# Altium PCB Rackmount_DSP.PcbDoc (part 15 of 24)
Units mil, origin at the board's own origin, x right, y up, seen from the top; angles counter-clockwise.
Board outline 10629.92 x 8267.72 mil, 4 copper layers (Top Layer, Mid Layer 1, Mid Layer 2, Bottom Layer), stack 36.2 mil thick; 4500 components, 1565 nets, 9765 pads, 3289 vias.
Unrouted connection lines stored in the file: 1.
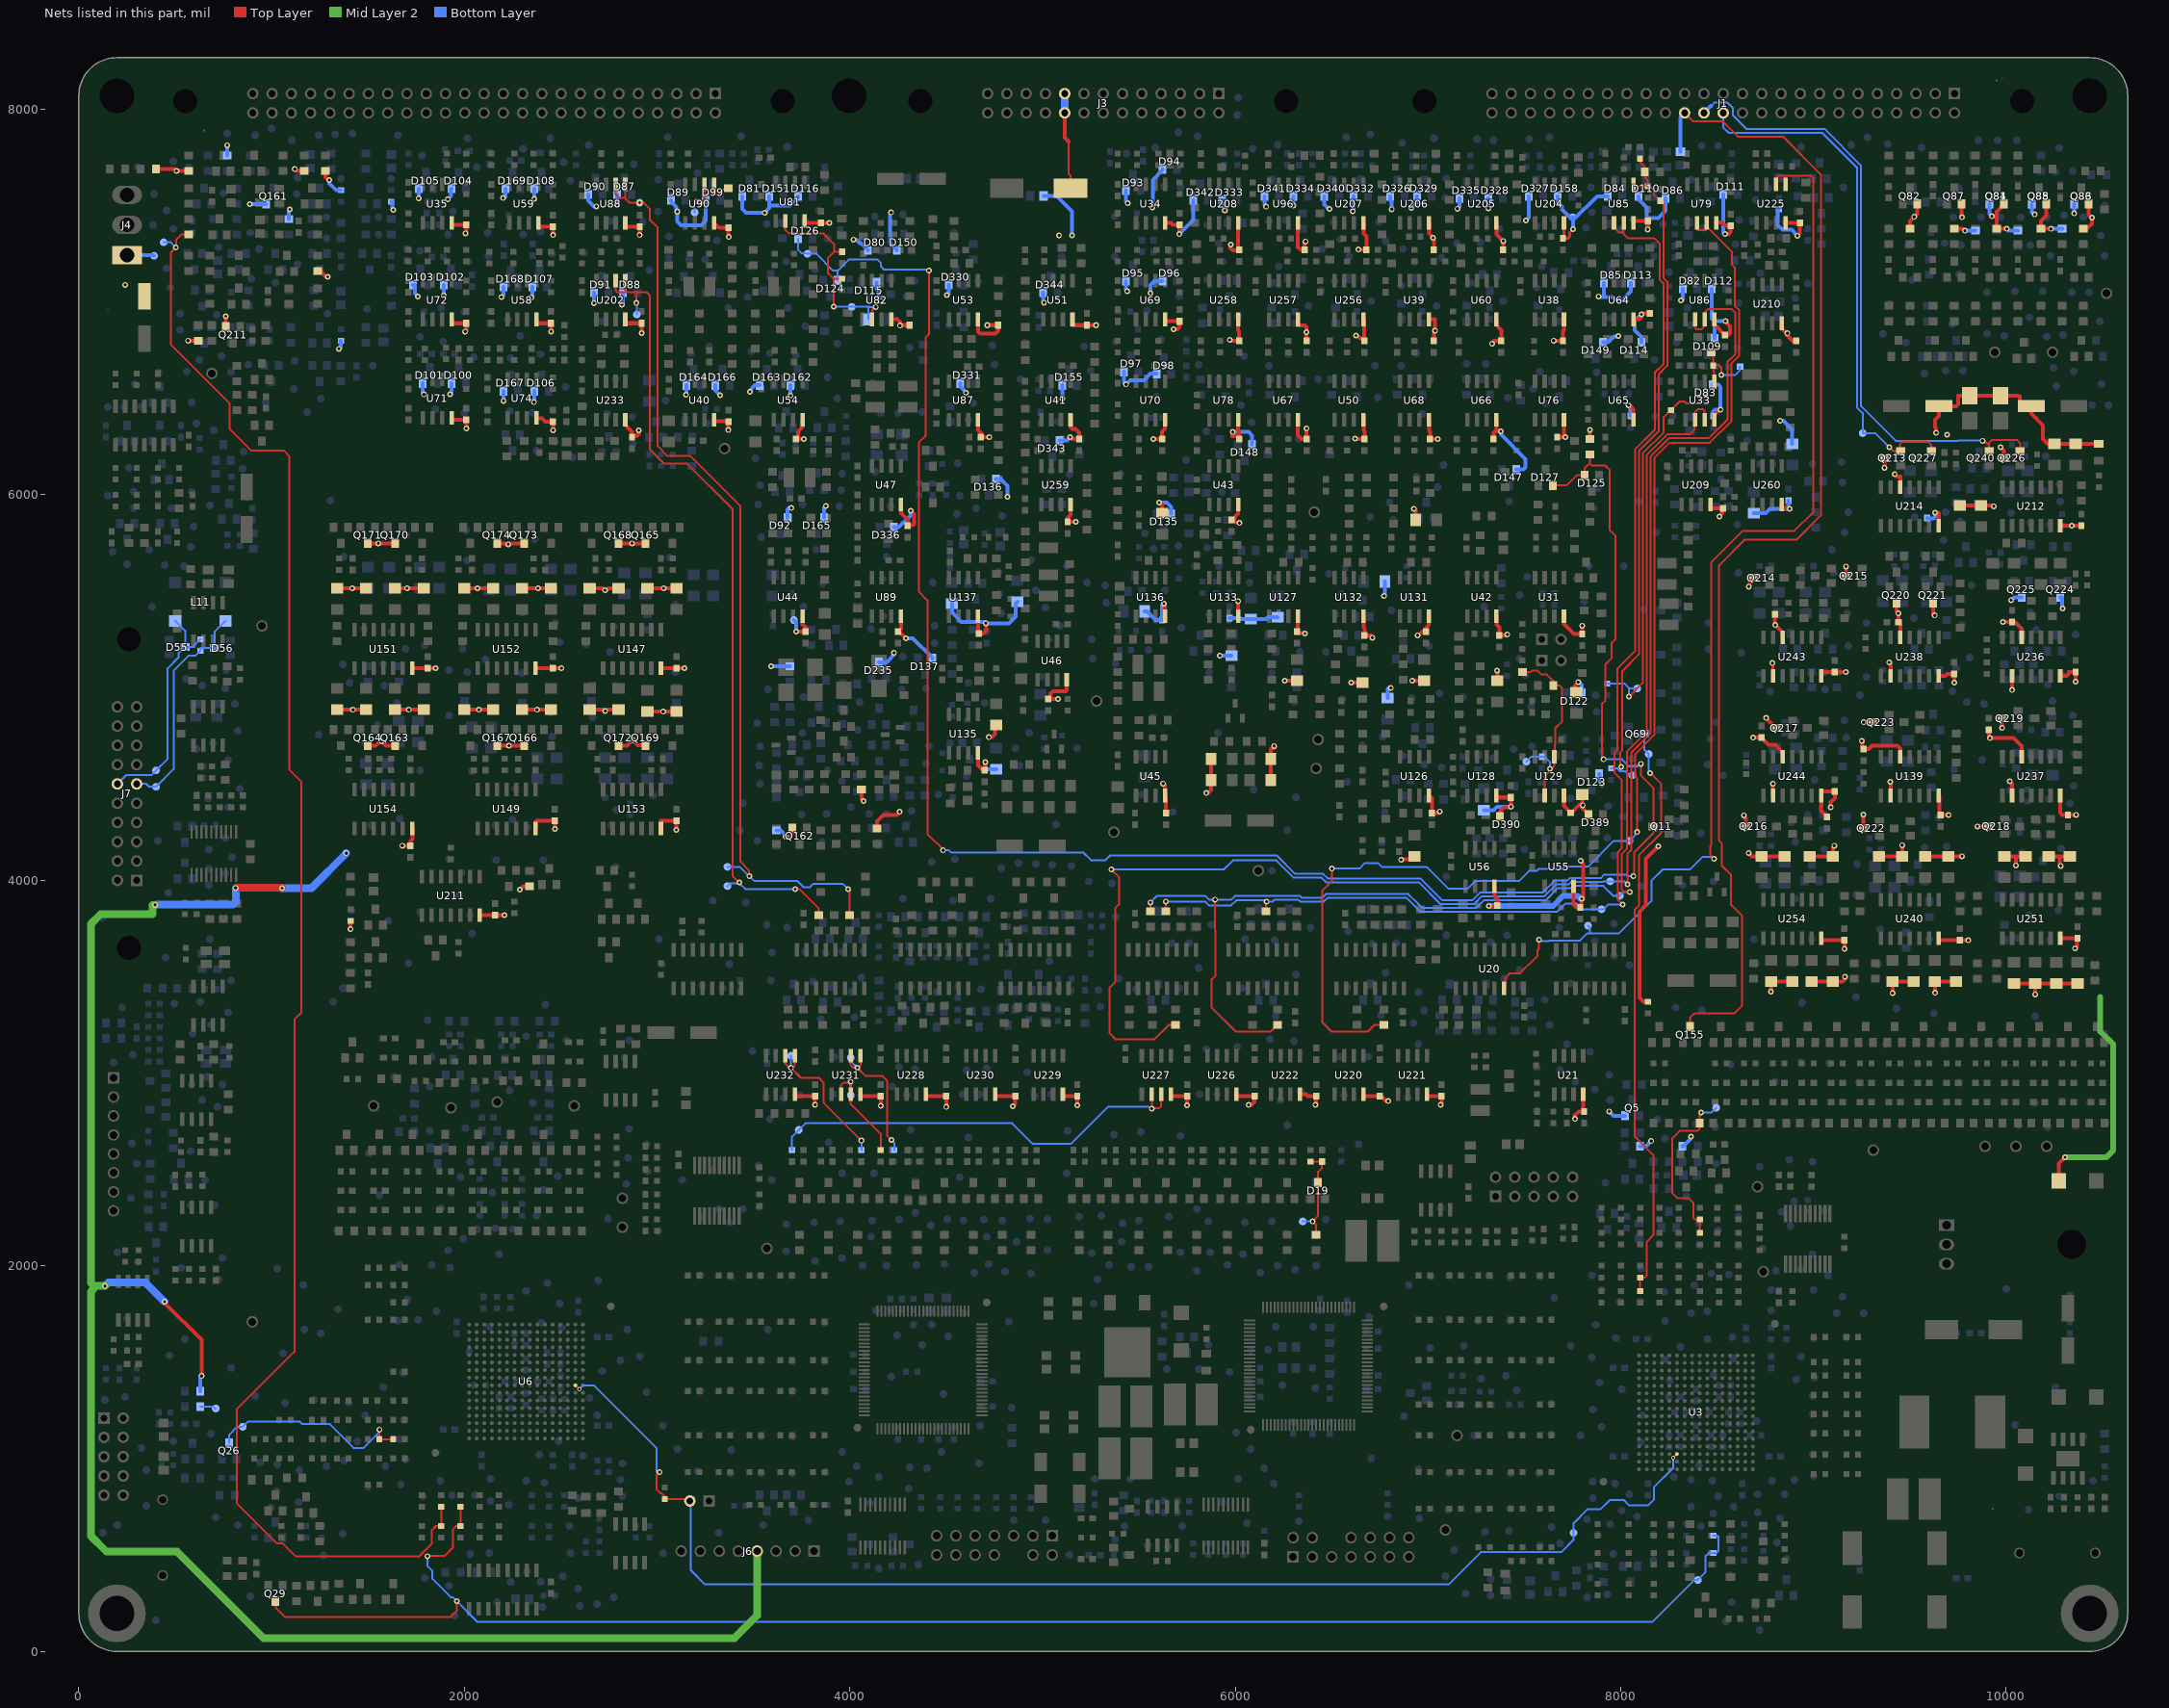
[diagram p17: the nets of this part, all layers, seen from the top]

## Via types
v1: diameter 30, hole 16, Top Layer to Bottom Layer, 3143 vias
v2: diameter 22, hole 12, Top Layer to Bottom Layer, 146 vias

## Nets (pads, with @x,y where several pads share a name; then routed paths per layer and width w, separated by ;. In a path a pad name is that pad's centre, name@x,y a point inside that pad or via, vN(x,y) a via of type N, cw(c..) or ccw(c..) an arc to the next point about the centre after c; other vN are vias at no path point) (continued)
REC_VIN_C: C1075.2 D19.3 R13.1 R929.1 TP800.1 | length 519.1
  Top Layer w10: R929.1@6390,2540 C1075.2@6450,2540 6450,2507.5 6430,2487.5 D19.3@6430,2431.5 6430,2259.1 v1(6400.9,2230) 6420,2210.9 R13.1@6420,2160
  Bottom Layer w10: TP800.1@6350,2230 v1(6400.9,2230)
RESET_FROM_REC: R723.2 R1043.2 R2224.2 TP803.1 | length 8613
  Top Layer w10: R2224.2@570,7350 531.36,7350 505.16,7323.8 505.16,7285.75 v1(503.21,7283.8) 477.72,7258.31 477.72,6778.64 782.5,6473.86 782.5,6340.97 893.87,6229.6 1062.09,6229.6 1092.42,6199.27 1092.42,4572.96 1153.35,4512.03 1153.35,3312.47 1118.48,3277.61 1118.48,1554.94 819.36,1255.81 819.36,768.43 1027.79,560 1057.58,560 1124.03,493.55 1766.18,493.55 1830,557.37 1830,626.46 1853.54,650 R723.2@1880,650 R1043.2@1880,750
  Bottom Layer w10: TP803.1@440,7310 477.01,7310 v1(503.21,7283.8)
SER_BUS_H: D55.3 J7.12 L11.4 R1349.1 TP1864.1 | length 1187.3
  Bottom Layer w10: J7.12@200,4500 245.25,4545.25 375.25,4545.25 TP1864.1@400,4570 460.37,4630.37 460.37,5099.66 517.39,5156.68 517.39,5179.39 548,5210 D55.3@551.5,5210 ; L11.4@499.29,5345 501.29,5345 551.5,5294.79 D55.3@551.5,5210 ; R1349.1@630,5250 629,5250 603.39,5224.39 603.39,5223.39 590,5210 D55.3@551.5,5210
SER_BUS_L: D56.3 J7.11 L11.3 R1349.2 TP471.1 | length 1181
  Bottom Layer w10: J7.11@300,4500 350,4500 365,4485 TP471.1@400,4485 491.79,4576.79 491.79,5087.86 568.33,5164.39 603.39,5164.39 629,5190 R1349.2@630,5190 630,5205 D56.3@703.5,5205 703.5,5289.79 758.71,5345 L11.3@760.71,5345
SERVICE_MODE: J12.2 R712.2 TP473.1 U3.L14 U6.B9 | length 6950.2
  Top Layer w10: U6.B9@2575.91,1380.32 v2(2595.59,1360.63) ; v1(3013.4,929.88) 2998.5,914.98 2998.5,906.78 2998.5,839.29 3017.79,820 3022.96,820 3040,802.96 R712.2@3040,790 3170,790 J12.2@3170,780 ; v2(8271.89,1003.78) U3.L14@8291.57,1023.46
  Bottom Layer w10: v2(2595.59,1360.63) 2613.98,1379.01 2672.92,1379.01 2998.5,1053.44 2998.5,929.88 v1(3013.4,929.88) ; J12.2@3170,780 3174.72,780 3174.72,420.79 3248.45,347.06 7106.58,347.06 7273.94,514.42 7690.4,514.42 7755,579.02 TP473.1@7755,615 7755,664.5 7826.98,736.48 7894.28,736.48 7942.8,785 8015,785 8041.94,758.06 8142.77,758.06 8171,786.29 8171,850.5 8271.89,951.39 v2(8271.89,1003.78)
SOFT_START_RELAY: C1176.1 J1.30 Q155.3 TP804.1 | length 6133.5
  Top Layer w10: J1.30@8331.5,7981.5 8376.5,7936.5 8529.56,7936.5 8607.06,7858.99 8841.29,7858.99 9037.5,7662.78 9037.5,5892.43 8912.45,5767.39 8643.21,5767.39 8510.03,5634.21 8510.03,4205.84 8523.87,4192 8523.87,4076.51 8572.62,4027.76 8572.62,3872.59 8629.46,3815.75 8629.46,3350.14 8590.13,3310.81 8382.69,3310.81 8360,3288.12 Q155.3@8360,3241.5
  Bottom Layer w20: C1176.1@8310,7780 8310,7957.61 8331.5,7979.1 J1.30@8331.5,7981.5 TP804.1@8335,7985
SOFT_START_RELAY_CPLD_IN: Q69.3 R671.1 R1074.2 TP470.1 | length 3073.2
  Top Layer w10: R1074.2@8100,1870 R671.1@8100,1940 8125.74,1940 8135.38,1949.64 8135.38,2125.75 8168.79,2159.16 8168.79,2575.17 8071.06,2672.9 8071.06,3846.99 8095.48,3871.4 8095.48,4132.11 8209.74,4246.37 8209.74,4499.62 v1(8152.71,4556.64)
  Bottom Layer w10: Q69.3@8121.5,4760 8121.5,4678.5 TP470.1@8145,4655 8144.66,4655 8144.66,4556.64 v1(8152.71,4556.64)
SOFT_START_RELAY_CPLD_OUT: R708.1 R999.2 R2413.1 TP805.1 | length 937.1
  Top Layer w10: R999.2@8410,2170 R708.1@8410,2240 8386.02,2240 8377.83,2248.19 8377.83,2325.08 8351.47,2351.44 8293.02,2351.44 8267.2,2377.25 8267.2,2662.79 8304.58,2700.17 8397.12,2700.17 8410,2713.04 R2413.1@8410,2740 8410,2788.13 v1(8417.23,2795.36)
  Bottom Layer w10: v1(8417.23,2795.36) 8470.36,2795.36 TP805.1@8495,2820
SYS_RESET: D124.2 D125.2 D126.2 D127.2 Q11.3 R1465.2 TP469.1 | length 10585.8
  Top Layer w10: v1(4410,7163.9) 4410,6832 4392.5,6814.5 4392.5,6305 4357.5,6270 4357.5,5497.87 4403.12,5452.25 4403.12,4239.8 4485.97,4156.96 v1(4484.41,4155.41) ; D127.2@7647.5,6048.5 7719.03,6048.5 7772.03,6101.5 D125.2@7812.5,6101.5 7812.5,6137.26 7838.37,6163.12 7840,6161.49 ; R1465.2@7840,6210 7840,6161.49 ; v1(7910.96,4627.5) 7901.38,4627.5 7901.38,4913.59 7920,4932.21 7920,5120.55 7953.11,5153.66 7953.11,5232.37 7971.72,5250.97 7971.72,5788.53 7943.06,5817.19 7943.06,6127.59 7919.75,6150.9 7850.59,6150.9 7840,6161.49 ; v1(8065.48,4022.38) 8068.5,4022.38 8068.5,4143.9 8168.5,4243.9 Q11.3@8168.5,4280 8168.5,4479.64 8105.19,4542.95 v1(8105.19,4604.77)
  Bottom Layer w10: D126.2@3732.5,7328.5 3732.5,7270.39 3748.7,7254.19 3775.81,7254.19 TP469.1@3780,7250 3826.73,7250 3913.51,7163.22 3937.5,7163.22 ; D124.2@3937.5,7111.5 3937.5,7163.22 ; v1(4410,7163.9) 4404.76,7169.14 4176.02,7169.14 4161.47,7183.7 4161.47,7202.92 4144.38,7220 3994.28,7220 3937.5,7163.22 ; v1(4484.41,4155.41) 4514.41,4155.41 4524.82,4145 5210.2,4145 5250.94,4104.26 5326.37,4104.26 5350.04,4127.93 6216.41,4127.93 6310.76,4033.58 6455.87,4033.58 6479.65,4009.8 6959.75,4009.8 7073.84,3895.71 7229.79,3895.71 7271.92,3937.84 7595.38,3937.84 7655.82,3998.28 7721.42,3998.28 7734.15,4011.01 7895.32,4011.01 7914.3,4030 8030.88,4030 8038.5,4022.38 v1(8065.48,4022.38) ; v1(7910.96,4627.5) 8006.01,4627.5 8041.17,4592.33 8089,4592.33 8101.44,4604.77 v1(8105.19,4604.77)
T_MOD: TP1863.1 U20.14 U225.1 U225.2 | length 5771.1
  Top Layer w10: U20.14@7395,3440 7401.5,3440 7401.5,3494.52 7425.3,3518.32 7477.54,3518.32 7568.58,3609.37 7568.58,3636.86 7574.51,3642.79 7574.51,3689.95 7575.99,3689.95 v1(7575.99,3691.61) ; v1(8483.19,4112.1) 8483.19,4115.89 8463.87,4135.21 8463.87,4176.14 8470.03,4182.31 8470.03,5650.78 8631.9,5812.65 8901.15,5812.65 8997.5,5909 8997.5,7646.21 8988.71,7655 8855,7655 ; U225.2@8805,7610 8805,7643.01 8816.99,7655 8855,7655 ; U225.1@8855,7610 8855,7655
  Bottom Layer w10: v1(7575.99,3691.61) 7575.99,3687.74 7578.94,3684.79 7626.24,3684.79 7629.3,3687.85 7789.06,3687.85 7824.61,3723.39 7840.59,3723.39 ; TP1863.1@7830,3765 7840.59,3754.41 7840.59,3723.39 ; v1(8483.19,4112.1) 8483.19,4121.14 8423.21,4121.14 8357.62,4055.55 8217.07,4055.55 8158.58,3997.06 8158.58,3892.61 7989.37,3723.39 7840.59,3723.39
V+CHG_PWM: J1.26 Q213.2 Q227.2 TP1769.1 | length 2722.9
  Top Layer w10: v1(9392.82,6247.41) 9412.73,6227.5 Q213.2@9447.71,6227.5 ; Q213.2@9451.5,6227.5 Q213.2@9447.71,6227.5 ; Q227.2@9611.5,6227.5 9611.5,6258.96 9594.86,6275.6 9460.29,6275.6 9447.71,6263.02 Q213.2@9447.71,6227.5
  Bottom Layer w10: J1.26@8531.5,7981.5 8531.5,7906.3 8560.04,7877.75 9044.91,7877.75 9227.13,7695.53 9227.13,6451.22 9255,6423.35 TP1769.1@9255,6320 9320.23,6320 v1(9392.82,6247.41)
V-CHG_PWM: J1.28 Q226.2 Q240.2 TP492.1 | length 3250.6
  Top Layer w10: v1(9876.75,6280.15) 9886.67,6280.15 9902.92,6263.9 9911.5,6263.9 ; Q240.2@9911.5,6227.5 9911.5,6263.9 ; Q226.2@10071.5,6227.5 10071.5,6268.93 10056.96,6283.47 9925.4,6283.47 9911.5,6269.57 9911.5,6263.9
  Bottom Layer w10: 8469.07,8018.12 8485.36,8034.4 8554.04,8034.4 8581.5,8006.95 8581.5,7967.86 8651.43,7897.92 9056.37,7897.92 9247.13,7707.17 9247.13,6459.62 9426.67,6280.07 9748.44,6280.07 9750.87,6282.5 9876.75,6282.5 v1(9876.75,6280.15)
  Bottom Layer w20: TP492.1@8430,7980 8430,7981.5 J1.28@8431.5,7981.5 8466.85,8016.85 8467.81,8016.85 8469.07,8018.12
VBAT+: R1158.1 TP1605.1 U79.6 U79.7 | length 6626.8
  Top Layer w10: v1(6500.68,4060.83) 6500.68,3994.26 6451,3944.58 6451,3265.07 6501.07,3215 6687.98,3215 6722.98,3250 R1158.1@6770,3250 ; v1(8084.92,4250.62) 8084.92,4526.84 8075,4536.76 8075,4654.94 8174.01,4753.95 8174.01,6190.16 8254.23,6270.38 8461.38,6270.38 8575,6384 8575,6682.35 8615.15,6722.5 8615.15,6956.47 8591,6980.62 8591,7179.25 8577.83,7192.42 8577.83,7259.46 U79.7@8445,7392.29 ; U79.6@8395,7410 8395,7378.78 8401.14,7372.64 8438.96,7372.64 8445,7378.68 U79.7@8445,7392.29 ; U79.7@8445,7410 U79.7@8445,7392.29
  Bottom Layer w10: v1(6500.68,4060.83) 6644.16,4060.83 6673.14,4089.8 6740.4,4089.8 6760.1,4070.1 6992.55,4070.1 7106.94,3955.71 7204.93,3955.71 7247.06,3997.84 7472.94,3997.84 7523.52,4048.43 7562.81,4048.43 7572.67,4058.28 7696.57,4058.28 7709.3,4071.01 7830.51,4071.01 7964.5,4205 TP1605.1@8045,4205 8073.47,4233.47 8073.47,4239.17 v1(8084.92,4250.62)
VBAT-: R1221.1 TP490.1 U86.6 U86.7 | length 7788
  Top Layer w10: v1(5356.62,4056.73) 5396.21,4017.13 5396.21,3875.37 5376.35,3855.51 5376.35,3471.75 5348.41,3443.81 5348.41,3205.65 5379.86,3174.2 5579.11,3174.2 5654.92,3250 R1221.1@5690,3250 ; v1(8034.17,3979.38) 8034.17,4137.85 8054.57,4158.25 8054.57,4662.79 8154.01,4762.23 8154.01,6198.44 8249.46,6293.89 8456.61,6293.89 8554.3,6391.59 8554.3,6690.34 8594.95,6730.99 8594.95,6944.61 8576.22,6963.34 8451.48,6963.34 8435.84,6947.7 8435.84,6910 U86.7@8435,6910 8435,6874.88 8420.12,6860 8391.9,6860 8385,6866.9 U86.6@8385,6910
  Bottom Layer w10: v1(5356.62,4056.73) 5941.49,4056.73 5987.73,4102.96 6213.09,4102.96 6302.48,4013.58 6447.59,4013.58 6471.36,3989.8 6951.46,3989.8 7065.55,3875.71 7238.07,3875.71 7280.2,3917.84 7603.66,3917.84 7664.1,3978.28 7729.7,3978.28 7742.44,3991.01 7906.01,3991.01 7910,3995 TP490.1@7945,3995 8018.55,3995 v1(8034.17,3979.38)
VBP_A: R3006.1 TP1895.1 U90.1 U90.2 | length 372.3
  Top Layer w10: v1(3202.82,7521.02) 3233.43,7521.02 3245,7532.59 3245,7559.74 ; U90.2@3245,7610 3245,7559.74 ; U90.1@3295,7610 3295,7559.74 ; R3006.1@3370,7590 3350.51,7590 3319.18,7558.67 3296.07,7558.67 3295,7559.74 ; 3245,7559.74 3295,7559.74
  Bottom Layer w10: TP1895.1@3195,7465 3195,7513.19 v1(3202.82,7521.02)
VBP_A/VOUT_A: R904.1 TP807.1 U231.1 U231.2 | length 784.5
  Top Layer w10: U231.2@4005,3090 4005,3040.82 4018.07,3027.75 v1(4038.8,3027.75) ; U231.1@4055,3090 4055,3040 4042.75,3027.75 v1(4038.8,3027.75) ; v1(4215.98,2652.71) 4194.77,2673.92 4194.77,2959.94 4170.59,2984.12 4082.43,2984.12 v1(4038.8,3027.75)
  Bottom Layer w10: TP807.1@4005,3080 4005,3076 4005.35,3075.66 4005.35,3061.21 v1(4038.8,3027.75) ; v1(4215.98,2652.71) 4230,2638.69 R904.1@4230,2600
VBP_B: R3007.1 TP489.1 TP1004.1 U88.1 U88.2 | length 4913.6
  Top Layer w10: U88.2@2785,7610 2785,7560 2805,7540 2833.95,7540 2835,7541.05 ; U88.1@2835,7610 2835,7541.05 ; v1(2910,7515) v1@2909.74,7515 ; v1(3478.42,4021.97) 3476.5,4021.97 3476.5,4052.72 3432.41,4096.81 3432.41,5941.24 3172.59,6201.06 3053.73,6201.06 3002.5,6252.29 3002.5,7387.89 2962.03,7428.35 2962.03,7484.59 2934.72,7511.9 2909.74,7511.9 v1@2909.74,7515 ; v1(3991.7,3954.21) 3997.88,3954.21 4000,3952.09 R3007.1@4000,3820 ; 2835,7541.05 2835,7536.32 2855.32,7516 2909.74,7516 v1@2909.74,7515
  Bottom Layer w10: TP489.1@3365,4070 3429.22,4070 v1@3478.42,4020.81 ; v1(3478.42,4021.97) v1@3478.42,4020.81 ; v1(3991.7,3954.21) 3963.24,3982.66 3811.17,3982.66 3792.72,3964.21 3760.26,3964.21 3728.98,3995.49 3504.9,3995.49 3479,4021.39 v1@3478.42,4020.81
VBP_B/VOUT_B: R909.1 TP808.1 U231.6 U231.7 | length 593
  Top Layer w10: U231.6@3955,2890 3955,2938.1 3966.94,2950.04 v1@4005,2950.04 ; v1(4005,2955.4) v1@4005,2950.04 ; R909.1@4160,2600 4160,2685 4005,2840 U231.7@4005,2890 v1@4005,2950.04
  Bottom Layer w10: TP808.1@4005,2885 v1(4005,2955.4)
VBP_C: R3008.1 TP488.1 TP1003.1 U202.1 U202.2 | length 4299.3
  Top Layer w10: U202.2@2785,7110 2785,7059.26 2794.26,7050 2835.9,7050 ; U202.1@2835,7110 2835,7050.9 2835.9,7050 ; v1(2892.09,6995.12) 2892.09,7050 ; v1(3426.96,3988.57) 3424.93,3988.57 3392.41,4021.09 3392.41,5924.67 3156.02,6161.06 3037.16,6161.06 2962.5,6235.72 2962.5,7034.97 2947.47,7050 2892.09,7050 ; v1(3716.78,3954.76) 3737.72,3954.76 3840,3852.49 R3008.1@3840,3820 ; 2835.9,7050 2892.09,7050
  Bottom Layer w10: v1(2892.09,6995.12) 2895,6992.21 TP1003.1@2895,6935 ; TP488.1@3365,3970 3380.45,3985.45 v1@3426.96,3985.45 ; v1(3426.96,3988.57) v1@3426.96,3985.45 ; v1(3716.78,3954.76) 3457.16,3954.76 3431.17,3980.75 3426.96,3980.75 v1@3426.96,3985.45
VBP_C/VOUT_C: R921.1 TP809.1 U232.1 U232.2 | length 851.8
  Top Layer w10: U232.2@3665,3090 3665,3047.82 3685.92,3026.9 v1(3695,3026.9) ; U232.1@3715,3090 3715,3040 3701.9,3026.9 v1(3695,3026.9) ; v1(4060,2649.76) 3864.75,2845.01 3864.75,2949.96 3839.33,2975.38 3746.52,2975.38 v1(3695,3026.9)
  Bottom Layer w10: v1(3695,3026.9) TP809.1@3695,3090 ; R921.1@4060,2600 v1(4060,2649.76)
VBP_FEEDBACK: R2200.1 TP1671.1 | length 85.7
  Bottom Layer w10: R2200.1@630,1270 696.34,1270 708.17,1258.17 TP1671.1@710,1260
VBP_FEEDBACK_IN: Q26.3 R754.2 R1035.2 TP487.1 | length 1074.8
  Top Layer w10: v1(1560,1150.54) R754.2@1560,1100 R1035.2@1630,1100
  Bottom Layer w10: Q26.3@780,1081.5 780,1123.15 821.85,1165 TP487.1@850,1165 877.57,1192.57 1144.23,1192.57 1156.92,1179.88 1299.91,1179.88 1424.8,1055 1476.85,1055 1560,1138.15 v1(1560,1150.54)
VBUS_N: R1161.1 R1217.1 TP486.1 U85.6 U85.7 | length 6505.2
  Top Layer w10: R1161.1@5640,3840 v1(5640,3890.26) ; R1217.1@6160,3840 6160,3886.18 v1(6162.79,3888.97) ; U85.6@7965,7410 7965,7386.5 7991.5,7360 8015,7360 ; v1(8010.32,3875) 7983.72,3901.6 7983.72,4143.97 8004.13,4164.38 8004.13,4521.72 7966.08,4559.78 7966.08,4661.12 7981.43,4676.47 7981.43,5097.13 8074.01,5189.7 8074.01,6235.16 8177.15,6338.3 8177.15,6634.64 8221,6678.49 8221,7097.35 8201,7117.35 8201,7303.75 8173.5,7331.25 8036.09,7331.25 8015,7352.35 8015,7360 ; U85.7@8015,7410 8015,7360
  Bottom Layer w10: v1(5640,3890.26) 5843.97,3890.26 5863.97,3870.26 5978.65,3870.26 6004.63,3896.24 6155.52,3896.24 v1(6162.79,3888.97) 6192.79,3888.97 6202.62,3898.8 6327.31,3898.8 6336.75,3889.35 6458.05,3889.35 6477.79,3909.09 6889.11,3909.09 6940.33,3857.88 6940.54,3857.88 6962.7,3835.71 7669.67,3835.71 7712.32,3878.37 7771.9,3878.37 7800.27,3850 TP486.1@7900,3850 7910.49,3850 7935.49,3875 v1(8010.32,3875)
VBUS_N_FOR_SS_CMP: C1223.2 R1458.1 R1603.1 R1606.2 R2560.2 TP485.1 U85.1 | length 3562.3
  Top Layer w10: v1(8001.85,4589.03) 7996.08,4589.03 7996.08,4662.58 8007.57,4674.08 8007.57,5085.69 8094.01,5172.13 8094.01,6226.87 8197.15,6330.02 8197.15,6626.35 8241,6670.21 8241,7105.63 8221,7125.63 8221,7509 C1223.2@8205,7525 8172.67,7557.33 8172.67,7580.83 8153.5,7600 R1603.1@8140,7600 ; U85.1@8065,7610 8075,7600 R1603.1@8140,7600 ; R1606.2@8100,7745 8100,7729.58 8100,7726.46 8110.63,7715.83 8125,7701.46 R2560.2@8125,7675 8125,7646.82 8129.72,7642.1 8140,7631.82 R1603.1@8140,7600
  Bottom Layer w10: R1458.1@7950,4580 7981.72,4580 7996.08,4565.64 ; v1(8001.85,4589.03) 7996.08,4589.03 7996.08,4565.64 ; TP485.1@8060,4545 8044.71,4545 8024.06,4565.64 7996.08,4565.64
VBUS_OVP: Q29.3 R672.2 R673.1 R1015.2 R1054.1 TP484.1 | length 8645.9
  Top Layer w10: Q29.3@1020,258.5 1021.08,258.5 1021.08,227.03 1071,177.12 1925.94,177.12 1961.14,212.31 v1(1961.14,259.81) ; v1(1809,493.95) 1809,496.32 1898.71,496.32 1940.05,537.66 1940.05,631.92 1958.13,650 R672.2@1980,650 R1015.2@1980,750
  Bottom Layer w10: v1(1809,493.95) 1807.62,493.95 1807.62,444.01 1834.06,417.57 1834.06,376.44 1929.48,281.02 1939.92,281.02 v1(1961.14,259.81) 2068.15,152.79 8164.35,152.79 8381.56,370 TP484.1@8400,370 8400,372.47 8440,412.47 8440,494.23 8455.77,510 R673.1@8480,510 8494.45,510 8506.61,522.16 8506.61,594.09 8500.7,600 R1054.1@8480,600
VBUS_P: R1157.1 R1212.1 TP483.1 U33.6 U33.7 | length 6520
  Top Layer w10: v1(5559.52,3885.16) 5560,3885.16 R1157.1@5560,3840 ; v1(5895.39,3900.26) 5895.39,3740.28 5897.21,3738.45 5897.21,3506 5877.41,3486.2 5877.41,3339.53 6001.94,3215 6182.5,3215 6217.5,3250 R1212.1@6220,3250 ; v1(8046.01,3939.13) 8046.01,3941.04 8016.01,3941.04 8004.06,3952.98 8004.06,4136.03 8033.09,4165.05 8033.09,4669.6 8134.01,4770.51 8134.01,6206.73 8241.17,6313.89 8358.89,6313.89 8385,6340 U33.6@8385,6390 8385,6429.68 8398.66,6443.34 8427.6,6443.34 8435,6435.95 U33.7@8435,6390
  Bottom Layer w10: v1(5559.52,3885.16) 5594.61,3920.26 5843.97,3920.26 5863.97,3900.26 v1(5895.39,3900.26) 5980.37,3900.26 5999.07,3918.97 6336.1,3918.97 6345.72,3909.35 6449.76,3909.35 6469.51,3929.09 6897.4,3929.09 6948.61,3877.88 6948.82,3877.88 6970.99,3855.71 7248.33,3855.71 7289.25,3896.63 7303.42,3896.63 7303.59,3896.8 7610.9,3896.8 7672.39,3958.28 7737.99,3958.28 7750.37,3970.66 7890.2,3970.66 7890.55,3971.01 7908.87,3971.01 7959.88,3920 TP483.1@7995,3920 7995,3924.44 7998.67,3924.44 8013.36,3939.13 v1(8046.01,3939.13)
VBUS_P/VBUS_N: R919.1 TP482.1 U227.6 U227.7 | length 2285.6
  Top Layer w10: U227.6@5565,2890 5565.97,2890 5565.97,2858.74 5566.27,2858.44 v1(5566.32,2815.85) v1(5566.32,2815.85) 5567.23,2816.77 5604.12,2816.77 5615,2827.66 U227.7@5615,2890
  Bottom Layer w10: R919.1@3700,2600 3700,2670 TP482.1@3735,2705 3770,2740 4842.32,2740 4949.82,2632.5 5147.35,2632.5 5341.16,2826.31 5551.66,2826.31 5562.12,2815.85 v1(5566.32,2815.85)
VBUS_P_FOR_SS_CMP: C1220.2 R1453.1 R1602.1 R1604.2 R2561.2 TP481.1 U33.1 | length 2474.8
  Top Layer w10: v1(8042.63,4953.13) 8114.01,5024.5 8114.01,6215.01 8223.07,6324.08 8223.07,6404.07 8259,6440 R1602.1@8260,6440 8261,6440 8305.3,6484.3 8330.29,6484.3 8340.62,6473.97 8392.47,6473.97 8485,6566.5 U33.1@8485,6590 8483.49,6590 8483.49,6641.51 8480,6645 R1604.2@8480,6670 8485,6670 R1604.2@8485,6674.87 ; R2561.2@8470,6740 8470,6729.26 8480,6719.26 8480,6674.87 R1604.2@8485,6674.87 ; v1(8521.74,6621.69) 8521.74,6661.1 8507.97,6674.87 R1604.2@8485,6674.87
  Bottom Layer w10: R1453.1@7930,5020 8020.55,5020 8042.63,4997.92 8042.63,4995 ; v1(8042.63,4953.13) 8042.63,4995 ; TP481.1@8085,4995 8042.63,4995 ; v1(8521.74,6621.69) 8526.06,6621.69 8526.06,6620.49 8593.5,6620.49 8617.49,6644.48 8617.49,6665 C1220.2@8620,6665
VBUS_REF: C1052.1 R1661.2 R1697.2 TP480.1 U81.6 U82.6 | length 1124.9
  Top Layer w10: U81.6@3665,7420 3665,7375.48 3683.6,7356.88 3861.38,7356.88 3918.59,7299.67 3918.59,7260 ; v1(3915.8,6976.46) 3915.8,7120 3917.03,7120 ; R1661.2@3960,7120 3917.03,7120 ; C1052.1@3960,7260 3918.59,7260 ; U82.6@4115,6910 4115,6960 4129.45,6974.45 v1(4134.81,6974.45) ; 3917.03,7120 3887.57,7149.46 3887.57,7228.98 3918.59,7260
  Bottom Layer w10: v1(3915.8,6976.46) 4010,6976.46 TP480.1@4010,6975 4095,6975 ; R1697.2@4095,6910 4095,6975 ; v1(4134.81,6974.45) 4104.81,6974.45 4104.26,6975 4095,6975
VBUS_ST_REF: C1050.1 R2083.2 R2383.1 TP1606.1 U129.2 U129.6 | length 1042.3
  Top Layer w10: R2083.2@7490,5080 7531.48,5080 7540.46,5088.98 7567.03,5088.98 7588.49,5067.53 7617.11,5067.53 7650,5034.63 R2383.1@7650,5010 7683.5,5010 7696.2,4997.3 7696.2,4824.86 7660,4788.66 7660,4707.79 7657.08,4704.86 7657.08,4640 U129.2@7655,4640 7654.01,4640 7654.01,4592.45 7640.04,4578.48 v1(7632.99,4578.48) 7632.99,4568.88 7605.27,4541.16 7605.27,4440 U129.6@7605,4440
  Bottom Layer w10: TP1606.1@7510,4615 7535,4640 C1050.1@7590,4640 7605.58,4640 7632.99,4612.59 v1(7632.99,4578.48)
VCC15+: C556.1 C558.1 C560.1 C566.1 C568.1 C571.1 C572.1 C573.1 C574.1 C576.1 C578.1 C583.1 C585.1 C590.1 C605.1 C607.1 C609.1 C610.1 C612.1 C614.1 C617.1 C621.1 C622.1 C630.1 C635.1 C637.1 C643.1 C645.1 C651.1 C654.1 C656.1 C658.1 C660.1 C662.1 C667.1 C668.1 C669.1 C672.1 C674.1 C679.1 C681.1 C692.1 C704.1 C727.1 C731.1 C733.1 C735.1 C737.1 C741.1 C746.1 C748.1 C750.1 C876.1 C877.1 C880.1 C882.1 C883.1 C886.1 C918.1 C929.1 C937.1 C938.1 C939.1 C940.1 C942.1 C943.1 C944.1 C945.1 C955.1 C966.1 C967.1 C968.1 C969.1 C970.1 C971.1 C973.1 C975.1 C977.1 C979.1 C981.1 C983.1 C985.1 C987.1 C989.1 C991.1 C993.1 C994.1 C996.1 C998.1 C1000.1 C1002.1 C1004.1 C1006.1 C1007.1 C1008.1 C1010.1 C1011.1 C1012.1 C1013.1 C1015.1 C1016.1 C1017.1 C1018.1 C1019.1 C1020.1 C1021.1 C1022.1 C1027.1 C1080.1 C1081.1 C1112.1 C1114.1 C1146.1 D1.2 D49.2 D80.2 D81.2 D82.2 D83.2 D84.2 D85.2 D86.2 D87.2 D88.2 D89.2 D90.2 D91.2 D92.2 D93.2 D94.2 D95.2 D96.2 D97.2 D98.2 D99.2 D100.2 D101.2 D102.2 D103.2 D104.2 D105.2 D106.2 D107.2 D108.2 D109.2 D110.2 D111.2 D112.2 D113.2 D114.2 D115.2 D116.2 D122.2 D123.2 D135.2 D136.2 D137.2 D147.2 D148.2 D149.2 D150.2 D151.2 D155.2 D158.2 D162.2 D163.2 D164.2 D165.2 D166.2 D167.2 D168.2 D169.2 D235.3 D326.2 D327.2 D328.2 D329.2 D330.2 D331.2 D332.2 D333.2 D334.2 D335.2 D336.2 D340.2 D341.2 D342.2 D343.2 D344.2 D389.2 D390.2 J3.17 J3.18 J4.1 J6.4 Q5.2 Q81.2 Q82.2 Q83.2 Q84.2 Q85.2 Q86.2 Q87.2 Q88.2 Q161.2 Q162.2 Q163.3 Q164.3 Q165.3 Q166.3 Q167.3 Q168.3 Q169.3 Q170.3 Q171.3 Q172.3 Q173.3 Q174.3 Q211.2 Q213.3 Q214.3 Q215.3 Q216.3 Q217.3 Q218.3 Q219.3 Q220.3 Q221.3 Q222.3 Q223.3 Q224.3 Q225.3 Q226.3 R72.2 R632.1 R1103.2 R1104.2 R1105.2 R1106.2 R1274.2 R1281.2 R1282.2 R1283.2 R1299.1 R1301.2 R1302.2 R1389.2 R1390.2 R1391.2 R1393.2 R1394.2 R1395.2 R1396.2 R1397.2 R1405.1 R1424.2 R1425.2 R1426.2 R1427.1 R1428.2 R1429.1 R1430.2 R1432.2 R1433.2 R1434.2 R1439.2 R1440.2 R1441.2 R1442.2 R1443.2 R1444.2 R1445.2 R1446.2 R1447.2 R1451.2 R1452.2 R1456.2 R1465.1 R1864.1 R1865.1 R1866.1 R1867.1 R1868.1 R1869.1 R1870.1 R1871.1 R1872.1 R1873.1 R1874.1 R1875.1 R1876.1 R1877.1 R1878.1 R1879.1 R1882.1 R1896.1 R1897.1 R1898.1 R1899.1 R1900.1 R1901.1 R1902.1 R1903.1 R1904.1 R1905.1 R1906.1 R1907.1 R1908.1 R1909.1 R1910.1 R1911.1 R1912.1 R1913.1 R1914.1 R1915.1 R1916.1 R1919.1 R1920.1 R1921.1 R1924.1 R2108.1 R2109.1 R2110.1 R2223.1 R2227.2 R2285.1 R2313.1 R2314.1 R2315.1 R2316.1 R2317.1 R2318.1 R2319.1 R2320.1 R2321.1 R2322.1 R2416.1 R2499.1 R2505.2 R2533.1 R2534.1 R2650.2 TP126.1 TP1676.1 TP1736.1 U21.8 U31.8 U33.8 U34.8 U35.8 U38.8 U39.8 U40.8 U41.8 U42.8 U43.8 U44.8 U45.8 U46.8 U47.8 U50.8 U51.8 U53.8 U54.8 U55.8 U56.8 U58.8 U59.8 U60.8 U64.8 U65.8 U66.8 U67.8 U68.8 U69.8 U70.8 U71.8 U72.8 U74.8 U76.8 U78.8 U79.8 U81.8 U82.8 U85.8 U86.8 U87.8 U88.8 U89.8 U90.8 U96.8 U126.8 U127.8 U128.8 U129.8 U131.8 U132.8 U133.8 U135.8 U136.8 U137.8 U139.5 U139.9 U139.14 U147.14 U149.14 U151.14 U152.14 U153.14 U154.14 U202.8 U204.8 U205.8 U206.8 U207.8 U208.8 U209.8 U210.8 U211.14 U212.14 U214.5 U214.14 U220.8 U221.8 U222.8 U225.8 U226.8 U227.8 U228.8 U229.8 U230.8 U231.8 U232.8 U233.8 U236.5 U236.9 U236.14 U237.5 U237.9 U237.14 U238.5 U238.9 U238.14 U240.14 U243.5 U243.9 U243.14 U244.5 U244.9 U244.14 U251.14 U254.14 U256.8 U257.8 U258.8 U259.8 U260.8 | length 51726.4
  Top Layer w10: 5135.35,7832.04 5135.35,7665 5145.35,7655 C1146.1@5145.35,7590
  Top Layer w15: C746.1@7700,7330 C746.1@7703.7,7330 ; U204.8@7705,7410 7705,7333.58 7703.7,7332.28 C746.1@7703.7,7330 ; v1(7753.22,7378.96) 7735.47,7361.21 7735.47,7339.96 7725.51,7330 C746.1@7703.7,7330 ; v1(8786.13,5127.19) 8790,5123.32 U243.9@8790,5060
  Top Layer w20: R1405.1@400,7690 496.49,7690 v1(506.49,7680) R2285.1@570,7680 ; v1(445.41,1813.98) 445.41,1807.05 636.28,1616.18 v1(636.28,1428.32) ; v1(566.16,6800) R2650.2@620,6800 ; Q211.2@762.5,6871.5 v1(762.5,6926.3) ; v1(813.35,3959.99) 815.59,3962.23 816.06,3962.23 v1@821.54,3962.23 ; v1(1120,7689.26) 1120,7687.5 1127.5,7680 R1274.2@1170,7680 ; R1301.2@1240,7160 1253.01,7160 1281.9,7131.11 1290.18,7131.11 1290.61,7130.68 v1(1291.04,7130.68) ; R1302.2@1280,7680 1280,7647.04 1294.31,7632.73 v1(1299,7632.73) ; R1915.1@1340,4885 v1(1422.28,4885) R1878.1@1490,4885 ; R1905.1@1340,5515 v1(1417.7,5515) R1904.1@1490,5515 ; v1(1410,3747.46) R2534.1@1410,3790 ; Q164.3@1500,4698.5 1540,4698.5 1562.32,4720.82 v1(1570.52,4720.82) 1592.83,4698.5 Q163.3@1640,4698.5 ; Q171.3@1500,5748.5 v1(1553.68,5748.5) Q170.3@1640,5748.5 ; R1901.1@1640,4885 v1(1712.28,4885) R1876.1@1790,4885 ; R1913.1@1640,5515 v1(1702.63,5515) R1875.1@1790,5515 ; v1(1677.62,4180) C1015.1@1720,4180 1720,4205 1730,4215 U154.14@1730,4270 ; U151.14@1730,5100 C1012.1@1810,5100 1850.59,5100 v1(1851.11,5100.51) ; U71.8@1935,6400 1935,6389.53 C940.1@2010,6389.53 ; U72.8@1935,6910 1935,6890 C741.1@2010,6890 2010.57,6890 2010.57,6852.97 2004.96,6847.36 2004.36,6847.36 v1(2004.36,6847.48) ; U35.8@1935,7410 1935,7400 C733.1@2010,7400 2010,7360.05 v1(2006.48,7356.52) ; R1867.1@2000,4885 v1(2075.92,4885) R1906.1@2150,4885 ; R1879.1@2000,5515 v1(2068.55,5515) R1916.1@2150,5515 ; v1(2010,6344.1) C940.1@2010,6389.53 ; C940.1@2010,6390 C940.1@2010,6389.53 ; U211.14@2080,3820 C1010.1@2160,3820 v1(2208.43,3820) ; Q167.3@2170,4698.5 v1(2231.42,4698.5) Q166.3@2310,4698.5 ; Q174.3@2170,5748.5 2210,5748.5 2215.12,5743.38 v1(2227.75,5743.38) 2227.75,5748.5 Q173.3@2310,5748.5 ; v1(2287.61,3951.41) 2306.19,3970 R2416.1@2338,3970 ; R1907.1@2300,4885 v1(2377.17,4885) R1868.1@2450,4885 ; R1874.1@2300,5515 v1(2381.94,5515) R1900.1@2450,5515 ; U149.14@2370,4270 2370,4303.57 2376.43,4310 C1112.1@2470,4310 v1(2470,4266.02) ; U152.14@2370,5100 C583.1@2460,5100 v1(2503.86,5100) ; U74.8@2375,6400 2377.24,6397.76 2403.11,6397.76 2420.86,6380 C556.1@2460,6380 v1(2460,6335.42) ; U58.8@2375,6910 2375,6890 C558.1@2450,6890 2450,6848.06 2449.69,6847.74 v1(2449.69,6847.13) ; U59.8@2385,7410 2385,7390 C996.1@2460,7390 v1(2460,7347.49) ; R1903.1@2650,4885 2724.4,4885 v1(2730.89,4878.51) 2737.38,4885 R1902.1@2800,4885 ; R1908.1@2650,5515 2719.67,5515 v1(2729.26,5505.41) 2738.91,5505.41 2748.5,5515 R1869.1@2800,5515 ; Q172.3@2800,4698.5 2844.66,4698.5 v1(2873.94,4727.78) 2900.94,4700.78 2937.72,4700.78 Q169.3@2940,4698.5 ; Q168.3@2800,5748.5 v1(2869.23,5748.5) Q165.3@2940,5748.5 ; U233.8@2835,6390 2835,6362.74 2870,6327.74 C560.1@2870,6306.3 ; U202.8@2835,6910 2835,6890 C979.1@2920,6890 v1(2920,6839.17) ; U88.8@2835,7410 2835,7390 C737.1@2910,7390 2910,7348.35 v1(2908.95,7347.3) ; C560.1@2870,6300 C560.1@2870,6306.3 ; v1(2905.36,6333.69) 2905.36,6313.14 2898.52,6306.3 C560.1@2870,6306.3 ; R1914.1@2950,4875 v1(3031.16,4875) R1877.1@3100,4875 ; R1866.1@2950,5515 v1(3033.97,5515) R1921.1@3100,5515 ; U153.14@3020,4270 3020,4310 C876.1@3100,4310 v1(3100,4261.09) ; U147.14@3020,5100 C571.1@3100,5100 v1(3142.49,5100) ; U40.8@3295,6390 3295,6380.58 3370,6380.58 C735.1@3370,6380 v1(3370,6335.81) ; U90.8@3295,7410 3320,7385 C975.1@3370,7385 3370,7349.32 3371.92,7347.41 3371.92,7337.38 v1(3372.3,7337.38) ; v1(3666.08,4226.21) 3686,4226.21 3702.5,4242.71 Q162.2@3702.5,4271.5 ; U232.8@3715,2890 3715,2880 C645.1@3820,2880 v1(3820,2834.95) ; C967.1@3720,6290 C967.1@3731.32,6290 ; v1(3720.89,5290) C1006.1@3770,5290 3770.79,5290 3770.79,5311.9 3755,5327.7 U44.8@3755,5370 ; U54.8@3755,6390 3755,6351.18 3731.32,6327.5 C967.1@3731.32,6290 ; v1(3761.7,6290) C967.1@3731.32,6290 ; U81.8@3765,7420 3765,7416.7 3771.7,7410 C989.1@3850,7410 v1(3894.01,7410) ; U231.8@4055,2890 4065,2880 C630.1@4160,2880 v1(4160,2830.14) ; R1456.2@4060,4470 4060,4422.33 v1(4071.51,4410.82) ; R2223.1@4140,4270 4140,4306.97 4172.49,4339.47 4243.11,4339.47 v1(4259.01,4355.36) ; U82.8@4215,6910 4246.5,6910 4259.91,6896.59 v1(4259.91,6877.69) 4262.22,6880 C987.1@4310,6880 ; U89.8@4265,5370 4266.34,5370 4266.34,5306.34 C578.1@4250,5290 4256.83,5290 v1(4291,5255.83) ; U47.8@4265,5950 4265,5904.75 4300,5869.75 C614.1@4300,5841.5 ; C614.1@4300,5840 C614.1@4300,5841.5 ; v1(4315.73,5916.6) 4332.44,5899.89 4332.44,5847.36 4326.58,5841.5 C614.1@4300,5841.5 ; U228.8@4395,2890 4405,2880 C1021.1@4500,2880 v1(4500,2824.32) ; U135.8@4665,4660 4665,4596.78 4691.78,4570 C970.1@4700,4570 4700,4610.17 v1(4703.81,4613.98) ; U137.8@4665,5370 4665,5285 C877.1@4670,5280 4690.68,5280 4707.41,5296.74 4707.41,5333.52 4705.45,5333.52 v1(4705.45,5333.89) ; U87.8@4665,6390 4666.46,6388.54 4666.46,6335.5 4680,6321.95 C1016.1@4680,6300 v1(4724.04,6300) ; U53.8@4665,6910 4665,6846.81 4674.5,6837.31 4756.29,6837.31 4770,6851.02 C1022.1@4770,6880 v1(4713.12,6880) ; v1(4721.49,4742.21) 4738.62,4742.21 4753.66,4757.25 4753.66,4805 R1432.2@4760,4805 ; U230.8@4755,2890 4765,2880 C1080.1@4857.35,2880 ; v1(4844.89,2828.44) 4857.35,2840.9 C1080.1@4857.35,2880 ; C1080.1@4860,2880 C1080.1@4857.35,2880 ; C605.1@5030,4940 C605.1@5040.91,4940 ; v1(5079.78,4940) C605.1@5040.91,4940 ; U229.8@5105,2890 5105,2880 C573.1@5180,2880 v1(5180,2833.43) ; J3.18@5114.96,7981.5 5114.96,7852.44 5135.35,7832.04 ; U46.8@5125,5040 5125,4985.06 5120.99,4981.05 5054.15,4981.05 5040.91,4967.81 C605.1@5040.91,4940 ; v1(5142.5,6298.78) 5143.79,6298.78 5152.56,6290 C692.1@5190,6290 5190,6321.57 5169.38,6342.19 5154.7,6342.19 5145,6351.89 U41.8@5145,6390 ; U259.8@5145,5950 5145,5895 5138.11,5888.11 5136.89,5888.11 5130,5881.21 C1081.1@5130,5860 v1(5172.69,5860) ; U51.8@5155,6910 5155,6880 C1017.1@5230,6880 v1(5277.42,6880) ; v1(5574.41,6290) C568.1@5620,6290 5620,6327.5 5635,6342.5 U70.8@5635,6390 ; v1(5604.87,5959.68) 5612.82,5959.68 5620,5952.5 R1428.2@5620,5905 ; v1(5625.65,4501.94) 5628.06,4501.94 5635,4495 U45.8@5635,4440 5640,4435 C610.1@5640,4350 ; v1(5629.42,5434.78) 5635,5429.19 U136.8@5635,5370 ; U69.8@5635,6910 5635,6900 C983.1@5709.68,6900 ; U34.8@5635,7410 5666.5,7410 5674,7402.5 5674,7400 C731.1@5710,7400 v1(5710,7352.35) ; U227.8@5665,2890 5665,2880 C635.1@5750,2880 v1(5750,2833.24) ; v1(5679.87,6858.51) 5699.92,6858.51 5709.68,6868.27 C983.1@5709.68,6900 ; C983.1@5710,6900 C983.1@5709.68,6900 ; v1(5850,4452.85) 5859.35,4452.85 5875,4468.5 R1105.2@5875,4520 R1106.2@5875,4630 ; v1(5970.92,6803.13) 5974.05,6800 C637.1@6020,6800 6020,6850 6015,6855 U258.8@6015,6910 ; v1(5976.54,7298.32) 5976.54,7294.95 5971.31,7294.95 5973.68,7292.58 5973.68,7281.18 5987.24,7267.63 6020,7267.63 C576.1@6020,7270 6014,7270 6014,7354 6015,7355 U208.8@6015,7410 ; C585.1@5980,5870 C585.1@5990,5870 ; v1(5987.04,6325.89) 5984,6322.86 5984,6304.14 C971.1@6015,6304.14 ; U226.8@6005,2890 6015,2880 C658.1@6100,2880 6100,2849.57 6084.65,2834.22 v1(6069.42,2834.22) ; U133.8@6015,5370 v1(6015.03,5447.41) ; U43.8@6015,5950 6015,5902.21 5996.59,5883.8 5996.59,5876.59 C585.1@5990,5870 ; U78.8@6015,6390 6015,6332.5 6020,6327.5 C971.1@6020,6304.14 ; v1(6021.58,5853.66) 6006.34,5853.66 C585.1@5990,5870 ; R1104.2@6185,4520 R1103.2@6185,4630 6185,4681.5 6190.63,4687.13 6200.39,4687.13 6205.61,4692.35 v1(6201.17,4696.78) ; v1(6256.49,5035) R1446.2@6320,5035 ; U127.8@6325,5370 6325,5295 C1002.1@6320,5290 6320,5282.5 6358.53,5282.5 v1(6361.03,5280) ; U67.8@6325,6390 6325,6309.78 6344.78,6290 C886.1@6370,6290 v1(6370,6343.65) ; U257.8@6325,6910 6325,6879.77 6360.5,6879.77 6368.87,6871.4 v1(6368.87,6844.15) 6370,6843.02 C622.1@6370,6800 ; U96.8@6325,7410 6325,7285.94 6340.94,7270 C973.1@6360,7270 6360,7309.08 v1(6365.04,7314.13) ; U222.8@6335,2890 6366.5,2890 6376.5,2880 C621.1@6420,2880 6420,2840.19 v1(6415.46,2835.65) ; v1(6600.56,5025.82) 6601.39,5025 R1439.2@6660,5025 ; v1(6621,6291.79) 6622.79,6290 C612.1@6670,6290 6670,6330 6665,6335 U50.8@6665,6390 ; v1(6626.8,6825.77) 6629.67,6825.77 6629.67,6829.99 6649.42,6810.24 C981.1@6661.71,6810.24 ; v1(6638.17,7272.32) 6640.49,7270 C750.1@6680,7270 6680,7340 6665,7355 U207.8@6665,7410 ; U220.8@6665,2890 6665,2880 C654.1@6750,2880 6757.38,2880 6784.58,2852.8 6791.24,2852.8 v1(6793.05,2854.6) ; U132.8@6665,5370 6665,5312.5 6670,5307.5 C681.1@6670,5270 6706,5270 6711.76,5264.24 v1(6711.76,5259.02) ; U256.8@6665,6910 6667.77,6910 6667.77,6816.3 C981.1@6661.71,6810.24 ; C981.1@6670,6800 6661.71,6808.29 C981.1@6661.71,6810.24 ; v1(6859.95,4106.46) 6862.46,4108.97 6930,4108.97 R1424.2@6930,4125 ; v1(6917.5,5035) R1425.2@6980,5035 ; v1(6926.86,5927.21) 6929.29,5927.21 6935,5921.5 R1426.2@6935,5870 ; v1(6946.36,5271.18) 6950.96,5271.18 6969.78,5290 C969.1@6990,5290 6990,5309.19 7003.5,5322.69 7003.5,5370 U131.8@7005,5370 ; U221.8@6995,2890 6995,2881.58 6996.58,2880 C656.1@7070,2880 7070,2840.38 v1(7064.76,2835.14) ; U126.8@7005,4440 7020,4425 C977.1@7020,4350 7056,4350 7061.11,4355.11 v1(7061.11,4357.53) ; U68.8@7005,6390 7005,6335 7010,6330 C566.1@7010,6290 v1(7051,6290) ; U39.8@7005,6910 7036.5,6910 7036.64,6909.86 v1(7036.64,6851.59) 7037.72,6851.59 7030,6843.86 C937.1@7030,6800 ; U206.8@7005,7410 7005,7355 v1(7026.3,7333.7) 7030,7330 C938.1@7030,7270 ; v1(7316.02,3866.8) 7317.49,3866.8 7321.79,3862.5 7360,3862.5 C1011.1@7360,3870 7360,3902.78 7345,3917.78 U56.8@7345,3970 ; v1(7331.83,6784.06) 7331.83,6787.83 7344,6800 C1018.1@7380,6800 7380,6854.3 7355,6879.3 U60.8@7355,6910 ; C607.1@7340,6290 7340,6322.72 7347.1,6329.81 v1@7364.1,6329.81 ; U128.8@7355,4440 7355,4430 C1027.1@7430,4430 v1(7430,4382.52) 7430,4378.91 7393.11,4378.91 7374.28,4360.09 7374.28,4331.5 D390.2@7372.5,4331.5 ; U42.8@7355,5370 7355,5326.83 7370,5311.83 C609.1@7370,5270 7406,5270 7411.14,5275.14 v1(7411.14,5275.31) ; U66.8@7355,6390 7355,6338.91 v1@7364.1,6329.81 ; U205.8@7355,7410 7355,7351.94 v1(7390,7316.94) C985.1@7390,7270 ; v1(7358.56,5087.68) 7358.56,5084.2 7360,5082.76 R1443.2@7360,5035 ; v1(7377.2,6329.81) v1@7364.1,6329.81 ; v1(7651.72,6800) C991.1@7700,6800 7700,6850 7705,6855 U38.8@7705,6910 ; C704.1@7670,6300 v1@7706,6300 ; U129.8@7705,4440 7705.53,4440 7705.53,4386.26 7740,4351.78 C617.1@7740,4350 7741.5,4350 7783.99,4392.49 v1@7794.99,4392.49 ; U31.8@7705,5370 7705,5330.11 7758.11,5277 C572.1@7800,5277 v1(7800,5321.21) ; U76.8@7705,6390 7705,6374.78 7706,6373.78 v1@7706,6300 ; v1(7712.18,6300) v1@7706,6300 ; U55.8@7755,3970 7755,3874.51 7769.51,3860 C883.1@7790,3860 7796,3860 7796,3900.02 v1@7799.57,3903.59 ; v1(7762.18,2761.82) 7761,2762.99 7761,2779.82 7781.97,2800.79 C1004.1@7804.13,2800.79 ; R1451.2@7770,4975 7763.22,4975 7763.22,5009.94 v1@7780.85,5027.57 ; v1@7779.07,5027.57 v1@7780.85,5027.57 ; v1(7791.61,4101.01) 7791.61,4097.53 7803.74,4085.4 7803.74,3903.59 v1@7799.57,3903.59 ; v1(7798.09,3903.59) v1@7799.57,3903.59 ; R1452.2@7800,4445 7800,4397.5 v1@7794.99,4392.49 ; v1(7803.6,4390.03) v1@7801.14,4390.03 ; U21.8@7805,2890 7804.13,2890 C1004.1@7804.13,2800.79 ; C1004.1@7810,2800 7804.13,2800 C1004.1@7804.13,2800.79 ; D389.2@7832.5,4341.5 7832.5,4345 7798.36,4379.14 7798.36,4387.25 v1@7801.14,4390.03 ; R1465.1@7840,6290 v1(7840,6336.68) ; v1(8040.83,6463.68) 8046.32,6463.68 8065,6445 U65.8@8065,6390 ; U64.8@8065,6910 8096.5,6910 8106.66,6920.16 v1(8106.66,6936.82) 8109.84,6940 C662.1@8150,6940 ; U85.8@8065,7410 8065,7420 C929.1@8140,7420 v1(8140,7376.96) ; R632.1@8140,3370 8118.01,3370 8096.51,3391.49 8096.51,3836.64 8130.51,3870.63 8130.51,4112.16 v1(8194.85,4176.51) ; U209.8@8465,5950 8465,5930 C668.1@8527.68,5930 ; U33.8@8485,6390 8485,6413.5 8513.02,6441.52 v1(8517.81,6441.52) ; U86.8@8485,6910 8485,6880.07 8489.93,6880.07 C672.1@8540,6830 8557.91,6830 8567.61,6839.69 8567.61,6873.77 8543.16,6898.21 v1(8543.16,6900.59) ; U79.8@8495,7410 8495,7412.53 8524.15,7412.53 8541.69,7395 C748.1@8570,7395 8570,7362.38 8560.86,7353.24 v1(8540.54,7353.24) ; v1(8511.4,5887.32) 8527.68,5903.6 C668.1@8527.68,5930 ; C668.1@8530,5930 C668.1@8527.68,5930 ; v1(8639.17,4337.16) 8639.17,4329.33 8648.5,4320 Q216.3@8648.5,4280 ; v1(8663.09,4140.95) 8663.09,4140.41 8678.5,4125 R1911.1@8730,4125 R1872.1@8850,4125 ; v1(8663.5,5523.48) 8670.02,5530 8670.02,5570 Q214.3@8688.5,5570 ; v1(8686.97,4740) C945.1@8730,4740 8767.04,4702.96 8801.83,4702.96 8840,4664.78 U244.5@8840,4640 ; v1(8753.25,4842.5) 8753.25,4841.75 8805,4790 Q217.3@8808.5,4790 ; v1(8779.26,3421.87) 8780,3422.6 R1871.1@8780,3475 R1910.1@8890,3475 ; U244.9@8790,4440 v1(8790,4500.76) ; C993.1@8800,5380 v1@8800,5328.99 ; v1(8801,5324.22) 8800,5324.22 v1@8800,5328.99 ; U260.8@8835,5950 8835,5932.2 8875.86,5932.2 v1(8875.86,5927.24) ; U210.8@8835,6890 8835,6863.04 8862.01,6836.03 8862.01,6835.04 v1@8867.46,6835.04 ; U243.5@8840,5260 8840,5288.99 v1@8800,5328.99 ; U225.8@8855,7410 C880.1@8930,7410 8930,7358.17 v1(8916.17,7344.34) ; v1(8864.84,6837.66) v1@8867.46,6835.04 ; C667.1@8910,6800 8892.01,6800 8862.22,6829.8 v1@8867.46,6835.04 ; R1909.1@8980,4125 R1870.1@9100,4125 9100,4172.5 v1(9107.62,4180.12) ; R1912.1@8990,3475 R1873.1@9100,3475 9151.5,3475 9162.5,3486 v1(9162.5,3499.02) ; U254.14@9040,3700 9050,3690 C994.1@9160,3690 v1(9160,3644.95) ; U243.14@9040,5060 9040,5080 C574.1@9110,5080 v1(9167.5,5080) ; C1019.1@9070,4330 9070,4331.5 9039.86,4361.64 9039.86,4384.86 9040,4385 U244.14@9040,4440 9040,4460 C643.1@9110,4460 9110.82,4460 9110.82,4426.74 9089.37,4405.3 v1(9089.37,4379.12) ; Q215.3@9168.5,5580 v1(9168.5,5628.52) ; v1(9250,4724.17) 9250,4724 9254,4720 9254,4680 C882.1@9260,4680 9285.02,4680 9303.14,4698.12 9435.47,4698.12 9450,4683.59 U139.5@9450,4640 ; Q222.3@9258.5,4270 v1(9258.5,4341.87) ; v1(9259.9,4820) Q223.3@9308.5,4820 ; R1920.1@9340,4125 R1865.1@9460,4125 v1(9460,4182.65) ; v1(9368.5,6140.51) Q213.3@9368.5,6190 ; v1(9392.2,5130.88) 9400,5123.09 U238.9@9400,5060 ; v1(9398.47,4511.03) 9400,4509.49 U139.9@9400,4440 ; v1(9410,3414.79) R2322.1@9410,3475 R2321.1@9520,3475 ; v1(9421.82,6107.42) 9434.24,6095 9450,6095 U214.5@9450,6040 ; Q220.3@9430,5438.5 9430,5395 v1(9440,5385) C669.1@9440,5340 9450,5330 U238.5@9450,5260 ; R1394.2@9500,7380 9500,7420 v1(9522.09,7442.09) 9537.5,7457.5 Q82.2@9537.5,7508.5 ; R2318.1@9580,4125 R2317.1@9700,4125 v1(9770.76,4125) ; Q221.3@9620,5438.5 9620,5383.44 v1(9629.12,5374.32) ; v1(9630,3416.31) R1919.1@9630,3475 R1864.1@9740,3475 ; v1(9631.11,5907.16) 9647.15,5907.16 9650,5904.31 U214.14@9650,5840 ; v1(9636.31,6321.5) 9636.31,6343.48 9631.57,6348.22 9631.57,6389.83 9650.24,6408.5 C944.1@9650.24,6460 9739.24,6460 9750,6470.76 9750,6515 C918.1@9810,6515 C955.1@9970,6515 10058.89,6515 10062.39,6511.5 10070.76,6511.5 10070.76,6460 C943.1@10129.76,6460 10129.76,6421.39 10190.63,6360.52 10190.63,6288.6 10214.24,6265 R1896.1@10250,6265 R1897.1@10360,6265 10422.5,6265 10424,6263.5 D49.2@10480,6263.5 ; U240.14@9650,3700 9650,3690 C1020.1@9760,3690 9801.18,3690 v1(9802.52,3688.66) ; U139.14@9650,4440 9653.05,4440 9653.05,4346.52 9660,4346.52 C590.1@9660,4340 9700.18,4340 v1(9701.64,4338.55) ; U238.14@9650,5060 9682.75,5060 9692.75,5070 C998.1@9730,5070 v1(9730,5025) ; R1390.2@9730,7380 9775.57,7380 v1(9785.57,7370) ; R1898.1@9760,5945 R1899.1@9870,5945 9930.79,5945 v1(9935.17,5940.63) ; Q87.2@9767.5,7508.5 9767.5,7442.16 v1(9770,7439.66) ; v1(9849.93,4280) Q218.3@9908.5,4280 ; C1013.1@9910,4780 9910,4742.5 v1(9915,4737.5) 10037.5,4737.5 10080,4695 U237.5@10080,4640 ; v1(9925,7444.53) 9950,7444.53 ; v1(9969.67,6247.1) 9971.4,6247.1 9988.5,6230 Q226.3@9988.5,6190 ; v1(9978.5,4791.06) Q219.3@9978.5,4840 ; v1(9982.47,5340) C1114.1@10030,5340 10045.99,5340 10080,5305.99 U236.5@10080,5260 ; Q81.2@9987.5,7508.5 9987.5,7505 9953.36,7470.86 9951.83,7470.86 9950,7469.02 9950,7444.53 ; R1924.1@9990,4125 10050,4125 ; v1(10003.2,7380) R1393.2@9950,7380 9950,7444.53 ; v1(10018.8,4513.52) 10030,4502.32 U237.9@10030,4440 ; v1(10030,4987.11) U236.9@10030,5060 ; R2319.1@10040,3465 R2320.1@10150,3465 ; v1(10050,4077.5) 10050,4125 ; R1882.1@10100,4125 10050,4125 ; v1(10150,3408.51) R2320.1@10150,3465 ; Q85.2@10207.5,7508.5 10207.5,7447.5 10180,7420 R1397.2@10180,7380 v1(10231.6,7380) ; R2314.1@10220,4125 10278.1,4125 ; D1.2@10272.5,2440 10272.5,2530.32 v1(10304.72,2562.54) ; U251.14@10280,3700 10368.31,3700 C1008.1@10368.31,3696.95 ; U237.14@10280,4440 10280,4351.15 10291.15,4340 C1007.1@10320,4340 v1(10361.77,4340) ; U236.14@10280,5060 10311.5,5060 10324,5072.5 10324,5080 C679.1@10360,5080 v1(10360,5029.91) ; U212.14@10280,5840 v1(10340.26,5840) C939.1@10390,5840 ; v1(10282.5,4075.1) 10278.1,4075.1 10278.1,4125 ; R2313.1@10330,4125 10278.1,4125 ; v1(10356.48,3646.97) 10368.31,3658.8 C1008.1@10368.31,3696.95 ; R2316.1@10370,3465 R2315.1@10260,3465 R2320.1@10150,3465 ; C1008.1@10370,3700 10370,3696.95 C1008.1@10368.31,3696.95 ; R1389.2@10400,7380 10418.08,7380 10443.58,7405.51 10443.58,7437.65 v1@10442.88,7438.35 ; Q86.2@10427.5,7508.5 10427.5,7453.74 v1@10442.88,7438.35 ; v1(10445,7438.35) v1@10442.88,7438.35 ; C971.1@6015,6304.14 6015,6295 C971.1@6020,6290 C971.1@6020,6304.14 ; C971.1@6015,6304.14 C971.1@6020,6304.14 ; v1@7780.85,5027.57 7784.06,5027.57 7785.85,5027.57 7783.35,5030.06 v1@7780.85,5027.57 ; v1@7794.99,4392.49 7798.68,4392.49 v1@7801.14,4390.03
  Top Layer w40: v1@821.54,3962.23 1051.73,3962.23 1051.73,3959.82 v1(1054.39,3959.82)
  Mid Layer 2 w30: v1(10304.72,2562.54) 10518.1,2562.54 10555,2599.43 10555,3148.04 10488.18,3214.86 10488.18,3395.49
  Mid Layer 2 w40: v1(135.62,1895.22) 77.65,1895.22 ; v1(395,3872.8) 383.48,3872.8 383.48,3826.08 383.48,3825.25 113.73,3825.25 62.48,3774.01 62.48,1910.4 77.65,1895.22 ; J6.4@3519.21,520 3519.21,186.42 3400.83,68.04 958.56,68.04 509.91,516.69 143.8,516.69 62.48,598.01 62.48,1867.09 77.65,1882.26 77.65,1895.22
  Bottom Layer w20: J4.1@250,7244.09 385.91,7244.09 TP1676.1@390,7240 ; R1283.2@630,1350 630,1428.32 v1(636.28,1428.32) ; R2227.2@770,7760 v1(770,7813.96) ; v1(887.57,7508.5) Q161.2@972.5,7508.5 ; R2505.2@1090,7430 1090,7475.13 v1(1094.87,7480) ; v1(1299,7632.73) 1299,7616.28 1335.28,7580 R2110.1@1360,7580 ; v1(1348.73,6757.21) 1352.21,6757.21 1360,6765 R2109.1@1360,6800 ; R2108.1@1620,7520 1626,7520 1626,7483.57 v1(1630.88,7478.69) ; D103.2@1732.5,7088.5 1742.78,7088.5 1742.78,7045 v1(1759.32,7028.46) ; v1(1762.5,7538.45) D105.2@1762.5,7588.5 ; D101.2@1782.5,6578.5 1782.5,6528.21 v1(1790.13,6520.59) ; v1(1892.5,7032.71) D102.2@1892.5,7088.5 ; v1(1914.5,7533.68) 1931.05,7550.23 1931.05,7588.5 D104.2@1932.5,7588.5 ; v1(1926.53,6521.87) 1932.5,6527.84 D100.2@1932.5,6578.5 ; v1(2192.18,7025.47) 2192.97,7025.47 2202.5,7035 D168.2@2202.5,7078.5 ; v1(2200.47,7539.56) 2207.06,7539.56 2212.5,7545 D169.2@2212.5,7588.5 ; v1(2202.5,6487.58) D167.2@2202.5,6538.5 ; v1(2347.01,7022.72) 2352.5,7028.21 D107.2@2352.5,7078.5 ; v1(2361.58,6480.64) 2362.5,6481.56 D106.2@2362.5,6538.5 ; v1(2362.5,7535.25) D108.2@2362.5,7588.5 ; D90.2@2642.5,7558.5 2642.5,7526 2672.05,7496.44 v1(2684.94,7496.44) ; v1(2672.5,6994.56) D91.2@2672.5,7048.5 ; v1(2792.5,7507.81) D87.2@2792.5,7558.5 ; v1(2817.95,6986.38) 2822.5,6990.93 D88.2@2822.5,7048.5 ; D89.2@3072.5,7528.5 3072.5,7519.44 3099.35,7492.59 3099.35,7474.4 v1(3104.35,7469.4) 3104.35,7419.28 3124.95,7398.68 3228.99,7398.68 3252.5,7422.19 D99.2@3252.5,7528.5 ; v1(3150.7,6519.59) 3152.5,6519.59 D164.2@3152.5,6568.5 ; D166.2@3302.5,6568.5 3301.02,6568.5 3301.02,6542.46 v1(3326.72,6516.76) ; D81.2@3442.5,7548.5 3442.5,7482.09 3461.46,7463.13 v1(3558.12,7463.13) 3582.5,7487.51 3582.5,7501.39 ; v1(3481.77,6534.16) 3481.77,6542.58 3507.68,6568.5 D163.2@3532.5,6568.5 ; D151.2@3582.5,7548.5 3582.5,7501.39 ; v1(3591.34,5110) R1282.2@3690,5110 ; R1299.1@3620,4260 3641,4260 3666.08,4234.93 v1(3666.08,4226.21) ; D92.2@3677.5,5881.5 3677.5,5925 3683.7,5931.2 v1(3697.08,5931.2) ; v1(3692.5,6514.67) D162.2@3692.5,6568.5 ; TP1736.1@3710,5350 3720.89,5339.11 v1(3720.89,5290) ; D116.2@3732.5,7548.5 3732.5,7545 3688.89,7501.39 3582.5,7501.39 ; D165.2@3867.5,5881.5 3867.5,5934.63 v1(3875.28,5942.41) ; v1(4019.45,7324.36) 4034.23,7324.36 4051.59,7307 4057.5,7307 4092.5,7272 D80.2@4092.5,7268.5 ; D115.2@4137.5,7101.5 4137.5,7068.68 4150.79,7055.39 4150.79,7016.52 v1(4162.68,7004.63) ; D235.3@4150,5131.5 4190,5131.5 4229.64,5171.14 v1(4229.64,5180.78) ; v1(4214.56,7464.69) 4208.36,7458.49 4208.36,7306.14 4242.5,7272 D150.2@4242.5,7268.5 ; D336.2@4227.5,5831.5 4253.92,5831.5 4315.73,5893.31 v1(4315.73,5916.6) ; v1(4291,5255.83) 4326.67,5255.83 4427.5,5155 D137.2@4427.5,5151.5 ; v1(4503.68,7035.62) 4512.5,7044.43 D330.2@4512.5,7088.5 ; R1430.2@4530,5435 4530,5389.74 4578.73,5341.01 4705.45,5341.01 v1(4705.45,5333.89) 4705.45,5333.52 4826.05,5333.52 4859.97,5367.44 4859.97,5434.97 R1429.1@4870,5445 ; D331.2@4572.5,6578.5 4572.5,6562.3 4605.02,6529.79 v1(4602.33,6529.79) ; v1(4703.81,4613.98) 4703.81,4583.58 4712.39,4575 R2499.1@4760,4575 ; D136.2@4757.5,6081.5 4783.45,6081.5 4816.76,6048.19 4816.76,5990.12 v1(4817.5,5989.38) ; D344.2@5002.5,7048.5 5002.5,7004.09 5007.45,6999.14 v1(5007.45,6997.36) ; C727.1@5005,7550 5072.83,7550 5153.35,7469.48 v1(5153.35,7345.36) ; D343.2@5087.5,6281.5 5127.5,6281.5 5143.79,6297.79 5143.79,6298.78 v1(5142.5,6298.78) ; v1(5102.5,6498.01) D155.2@5102.5,6568.5 ; D97.2@5422.5,6638.5 5422.5,6583.72 v1(5433.11,6573.11) 5454.99,6595 5526.05,6595 5559.55,6628.5 D98.2@5592.5,6628.5 ; D95.2@5432.5,7108.5 5432.5,7061.68 v1(5438.79,7055.38) ; D93.2@5432.5,7578.5 5432.5,7522.44 v1(5441.49,7513.46) ; R1427.1@5530,5395 5542.46,5395 5587.46,5350 C968.1@5620,5350 5620,5425.36 v1(5629.42,5434.78) ; v1(5560.29,7046.29) 5560.29,7088.68 5580.11,7108.5 D96.2@5622.5,7108.5 ; v1(5568.48,7490) 5571.64,7493.16 5571.64,7634.14 5622.5,7685 D94.2@5622.5,7688.5 ; v1(5604.87,5959.68) 5645.08,5959.68 5667.5,5937.26 D135.2@5667.5,5901.5 ; v1(5710,7352.35) 5782.5,7424.85 D342.2@5782.5,7528.5 ; v1(5920.48,5165) R1441.2@5980,5165 ; D333.2@5932.5,7528.5 5942.5,7528.5 5942.5,7478.78 v1(5945.57,7475.71) ; C651.1@5970,5360 6015.03,5360 ; v1(5987.04,6325.89) 6068.54,6325.89 6087.5,6306.94 D148.2@6087.5,6261.5 ; v1(6015.03,5447.41) 6015.03,5360 ; D341.2@6152.5,7548.5 6152.5,7505 6150.95,7503.45 v1(6160,7494.4) ; R1445.2@6220,5365 6168.5,5365 6158.5,5355 R1442.2@6080,5355 6028.5,5355 6023.5,5360 6015.03,5360 ; v1(6300.31,7499.97) 6302.5,7502.16 D334.2@6302.5,7548.5 ; D340.2@6462.5,7548.5 6462.5,7505 6484.92,7482.58 v1(6489.4,7482.58) ; v1(6609.4,7470.33) 6612.5,7473.43 D332.2@6612.5,7548.5 ; v1(6771.76,5475.21) 6775,5478.45 R1440.2@6775,5550 ; R1447.2@6790,4945 6790,4992.5 6795.95,4998.45 v1(6806.9,4998.45) ; D326.2@6802.5,7548.5 6802.5,7528.86 6811.88,7519.49 v1(6811.88,7481.69) ; v1(6913.55,7487.67) 6940.65,7514.77 6940.65,7548.5 D329.2@6942.5,7548.5 ; v1(7152.34,7483.93) 7162.5,7494.1 D335.2@7162.5,7538.5 ; R1444.2@7290,4365 7341.5,4365 7359.02,4382.52 v1(7430,4382.52) ; v1(7312.5,7486.17) D328.2@7312.5,7538.5 ; v1(7316.02,3866.8) 7317.49,3866.8 7318.27,3866.02 v1@7318.84,3866.02 ; v1(7377.2,6329.81) 7377.2,6313.16 7506.32,6184.04 7506.32,6141.86 7495.96,6131.5 D147.2@7457.5,6131.5 ; v1(7507.61,7422.86) 7507.61,7423.91 7522.5,7438.79 D327.2@7522.5,7548.5 ; D158.2@7672.5,7548.5 7672.5,7518.91 7696.1,7495.3 7696.1,7480.98 7743.54,7433.54 TP126.1@7750,7440 7750,7428 TP126.1@7753.22,7424.79 ; v1(7753.22,7378.96) TP126.1@7753.22,7424.79 ; v1(7779.07,5027.52) 7784.06,5027.52 7784.06,5025.88 7797.5,5012.43 D122.2@7797.5,4971.5 ; v1(7884.26,7029.71) 7887.24,7026.73 7912.5,7026.73 ; D123.2@7887.5,4551.5 7888.72,4551.5 7888.72,4512.42 v1(7902.64,4498.5) ; D149.2@7907.5,6791.5 7932.88,6791.5 7963.74,6822.36 7976,6822.36 7977.5,6823.86 v1(7986.66,6823.86) ; D85.2@7912.5,7098.5 7912.5,7026.73 ; D84.2@7932.5,7548.5 7876.93,7548.5 TP126.1@7753.22,7424.79 ; v1(7939.86,2801.41) 7962.77,2778.5 Q5.2@8022.5,2778.5 ; v1(8040.83,6463.68) 8050,6454.52 C660.1@8050,6410 ; D113.2@8052.5,7098.5 8052.5,7055 8008.61,7011.11 7973,7011.11 7957.38,7026.73 7912.5,7026.73 ; D110.2@8092.5,7548.5 8092.5,7533.17 8134.22,7491.45 8134.22,7441.07 8138.92,7436.36 8140,7436.36 ; R72.2@8100,2620 8131.21,2620 v1(8158.23,2647.02) ; v1(8106.66,6936.82) 8072.74,6902.89 8072.74,6852.8 8107.5,6818.04 D114.2@8107.5,6791.5 ; v1(8140,7376.96) 8140,7436.36 ; D86.2@8232.5,7538.5 8232.5,7474.07 8194.79,7436.36 8140,7436.36 ; v1(8312.18,7008.66) 8314.51,7010.99 8322.5,7010.99 D82.2@8322.5,7068.5 ; R1281.2@8320,2620 8323.76,2620 8359.43,2655.67 8359.43,2659.43 8364.96,2664.96 v1(8364.96,2670.17) ; D112.2@8472.5,7068.5 8472.5,6913.99 8485.9,6900.59 8487.5,6900.59 ; D83.2@8477.5,6571.5 8506.38,6571.5 8517.81,6560.07 v1(8517.81,6441.52) 8488.9,6441.52 8480,6432.62 C674.1@8480,6410 ; D109.2@8487.5,6811.5 8487.5,6900.59 ; D111.2@8532.5,7558.5 8532.5,7361.28 v1(8540.54,7353.24) ; v1(8543.16,6900.59) 8487.5,6900.59 ; R1433.2@8690,5905 8751.66,5905 8773.89,5927.24 v1@8870,5927.24 ; R2533.1@8820,7480 8815,7480 8815,7398.43 8838.43,7375 8885.52,7375 v1(8916.17,7344.34) ; v1(8827.51,6384.14) 8843.15,6384.14 8890,6337.29 R1434.2@8890,6265 ; C966.1@8870,5970 v1@8870,5927.24 ; v1(8875.86,5927.24) v1@8870,5927.24 ; C1000.1@9590,5880 9590,5877.87 9623.48,5877.87 9631.11,5885.49 v1(9631.11,5907.16) ; v1(9785.57,7370) R1396.2@9840,7370 ; Q84.2@9912.5,7508.5 9912.5,7457.03 v1(9925,7444.53) ; v1(10003.2,7380) 10013.2,7370 R1391.2@10060,7370 ; v1(10025.2,5453.83) 10039.87,5468.5 Q225.3@10080,5468.5 ; Q88.2@10132.5,7508.5 10132.5,7465 10142.62,7454.88 v1(10146.84,7454.88) ; v1(10231.6,7380) R1395.2@10290,7380 ; Q224.3@10280,5468.5 10290,5468.5 10290,5417.09 10292.31,5414.78 v1(10292.31,5410.13) ; v1(10352.5,7459.75) Q83.2@10352.5,7508.5
  Bottom Layer w30: v1@7318.84,3866.02 7647.82,3866.02 7701.36,3919.56 7776.11,3919.56 7792.08,3903.59 v1(7798.09,3903.59)
  Bottom Layer w40: v1(135.62,1895.22) 135.62,1896.01 152.59,1912.98 344.84,1912.98 443.84,1813.98 v1(445.41,1813.98) ; v1(395,3872.8) 400.94,3872.8 401.48,3873.33 797.57,3873.33 813.35,3889.11 v1(813.35,3959.99) ; v1(1054.39,3959.82) 1206.74,3959.82 v1(1387.52,4140.6) ; J3.18@5114.96,7981.5 J3.17@5114.96,8081.5
  other v1: 9692.58,6311.85 239.47,7089.64 5086.3,7345.36